# Altium PCB SingleMatrix.PcbDoc
Units mm, origin at the board's own origin, x right, y up, seen from the top; angles counter-clockwise.
Board outline 33.02 x 53.97 mm, 3 copper layers (Top Layer, Drahtbrücke, Bottom Layer); 6 components, 23 nets, 52 pads, 6 vias.
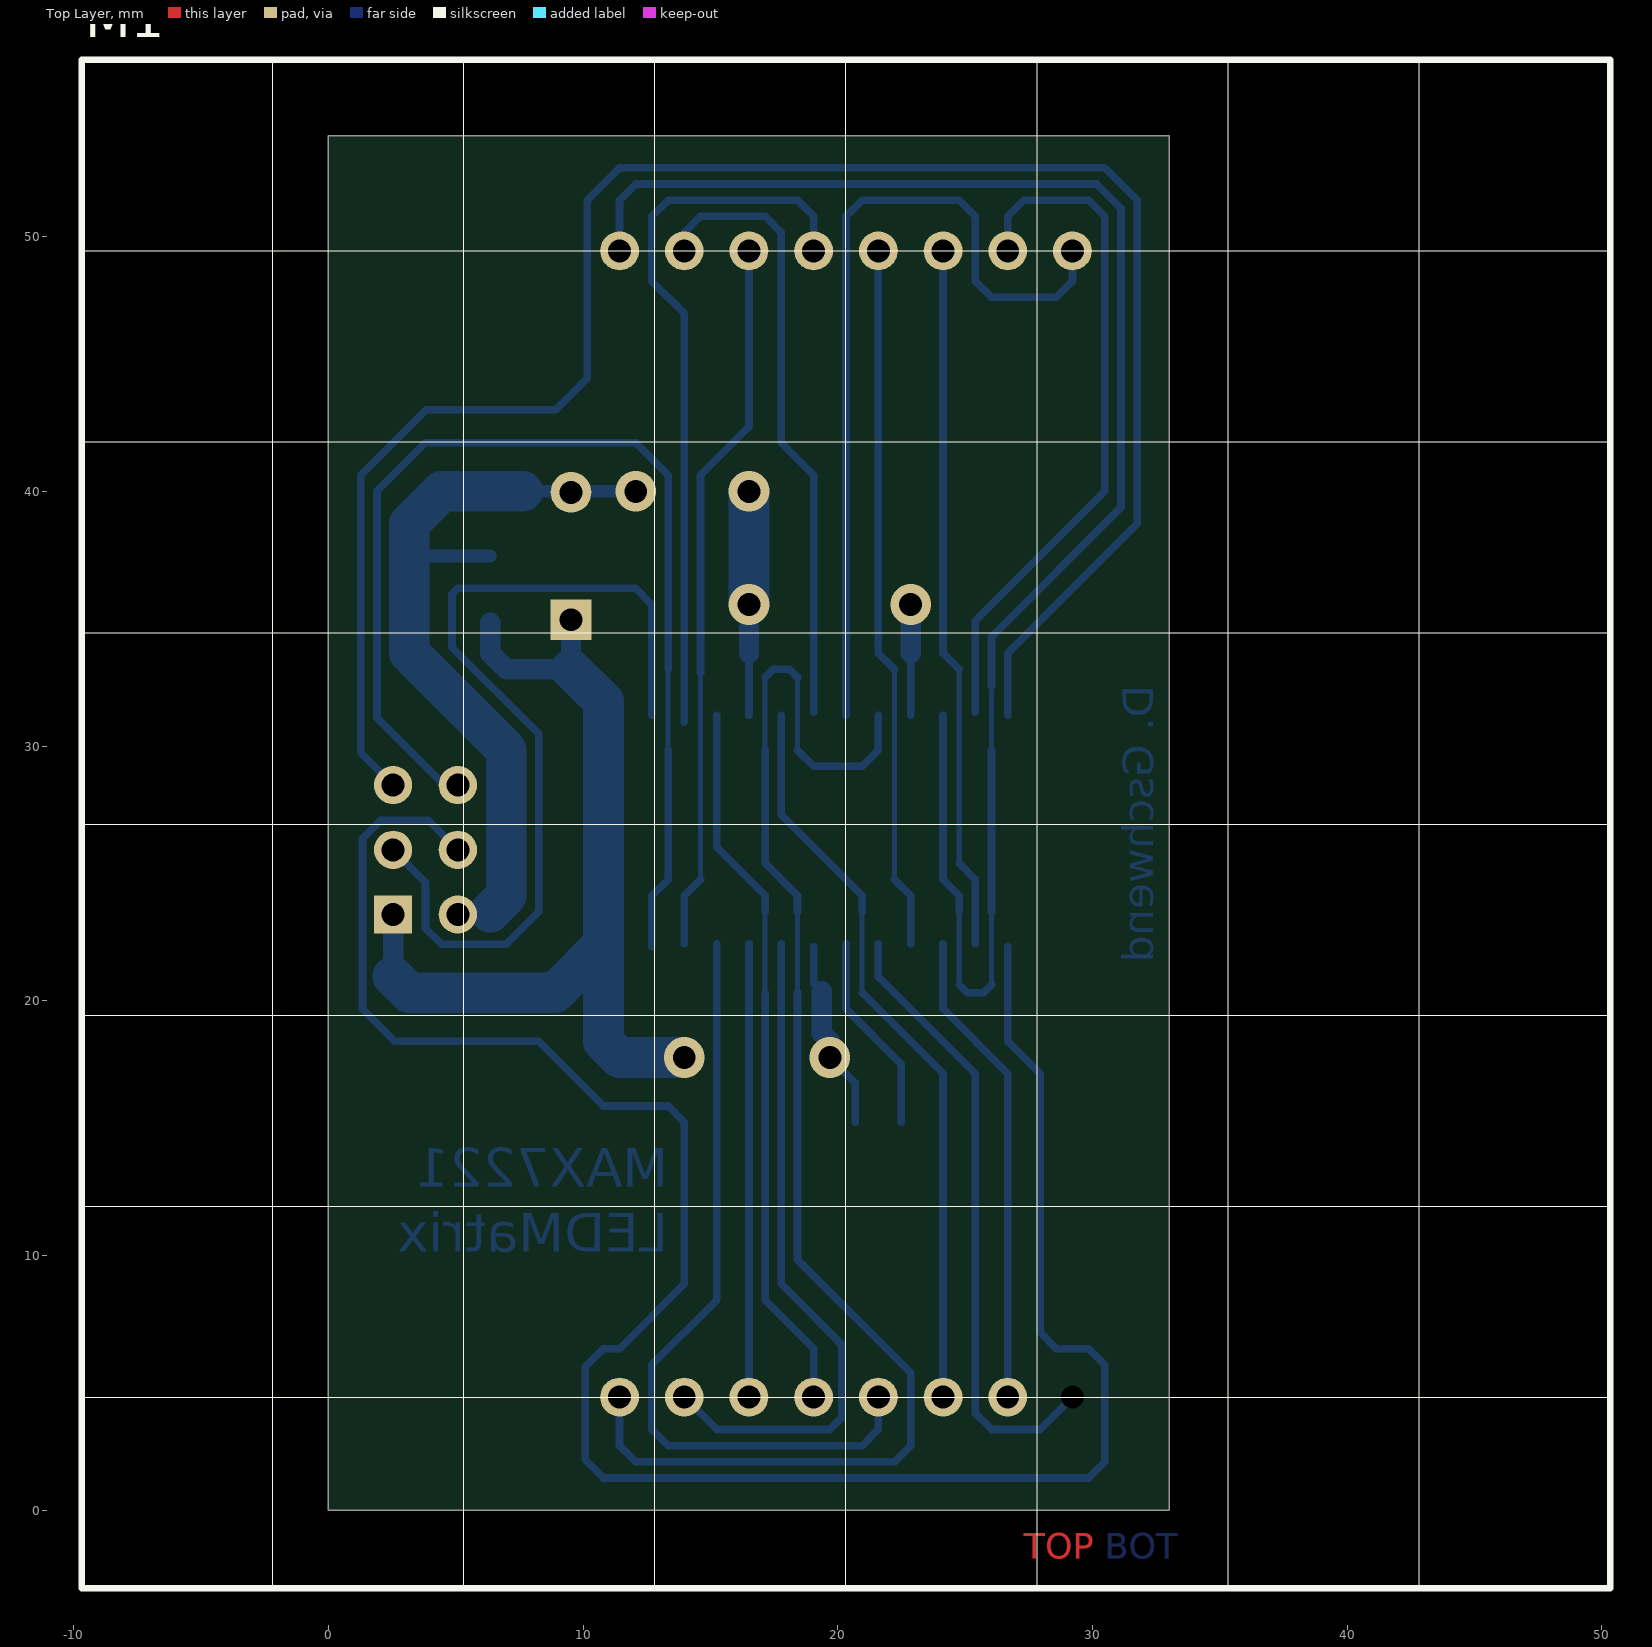
[diagram p0: Top Layer view]
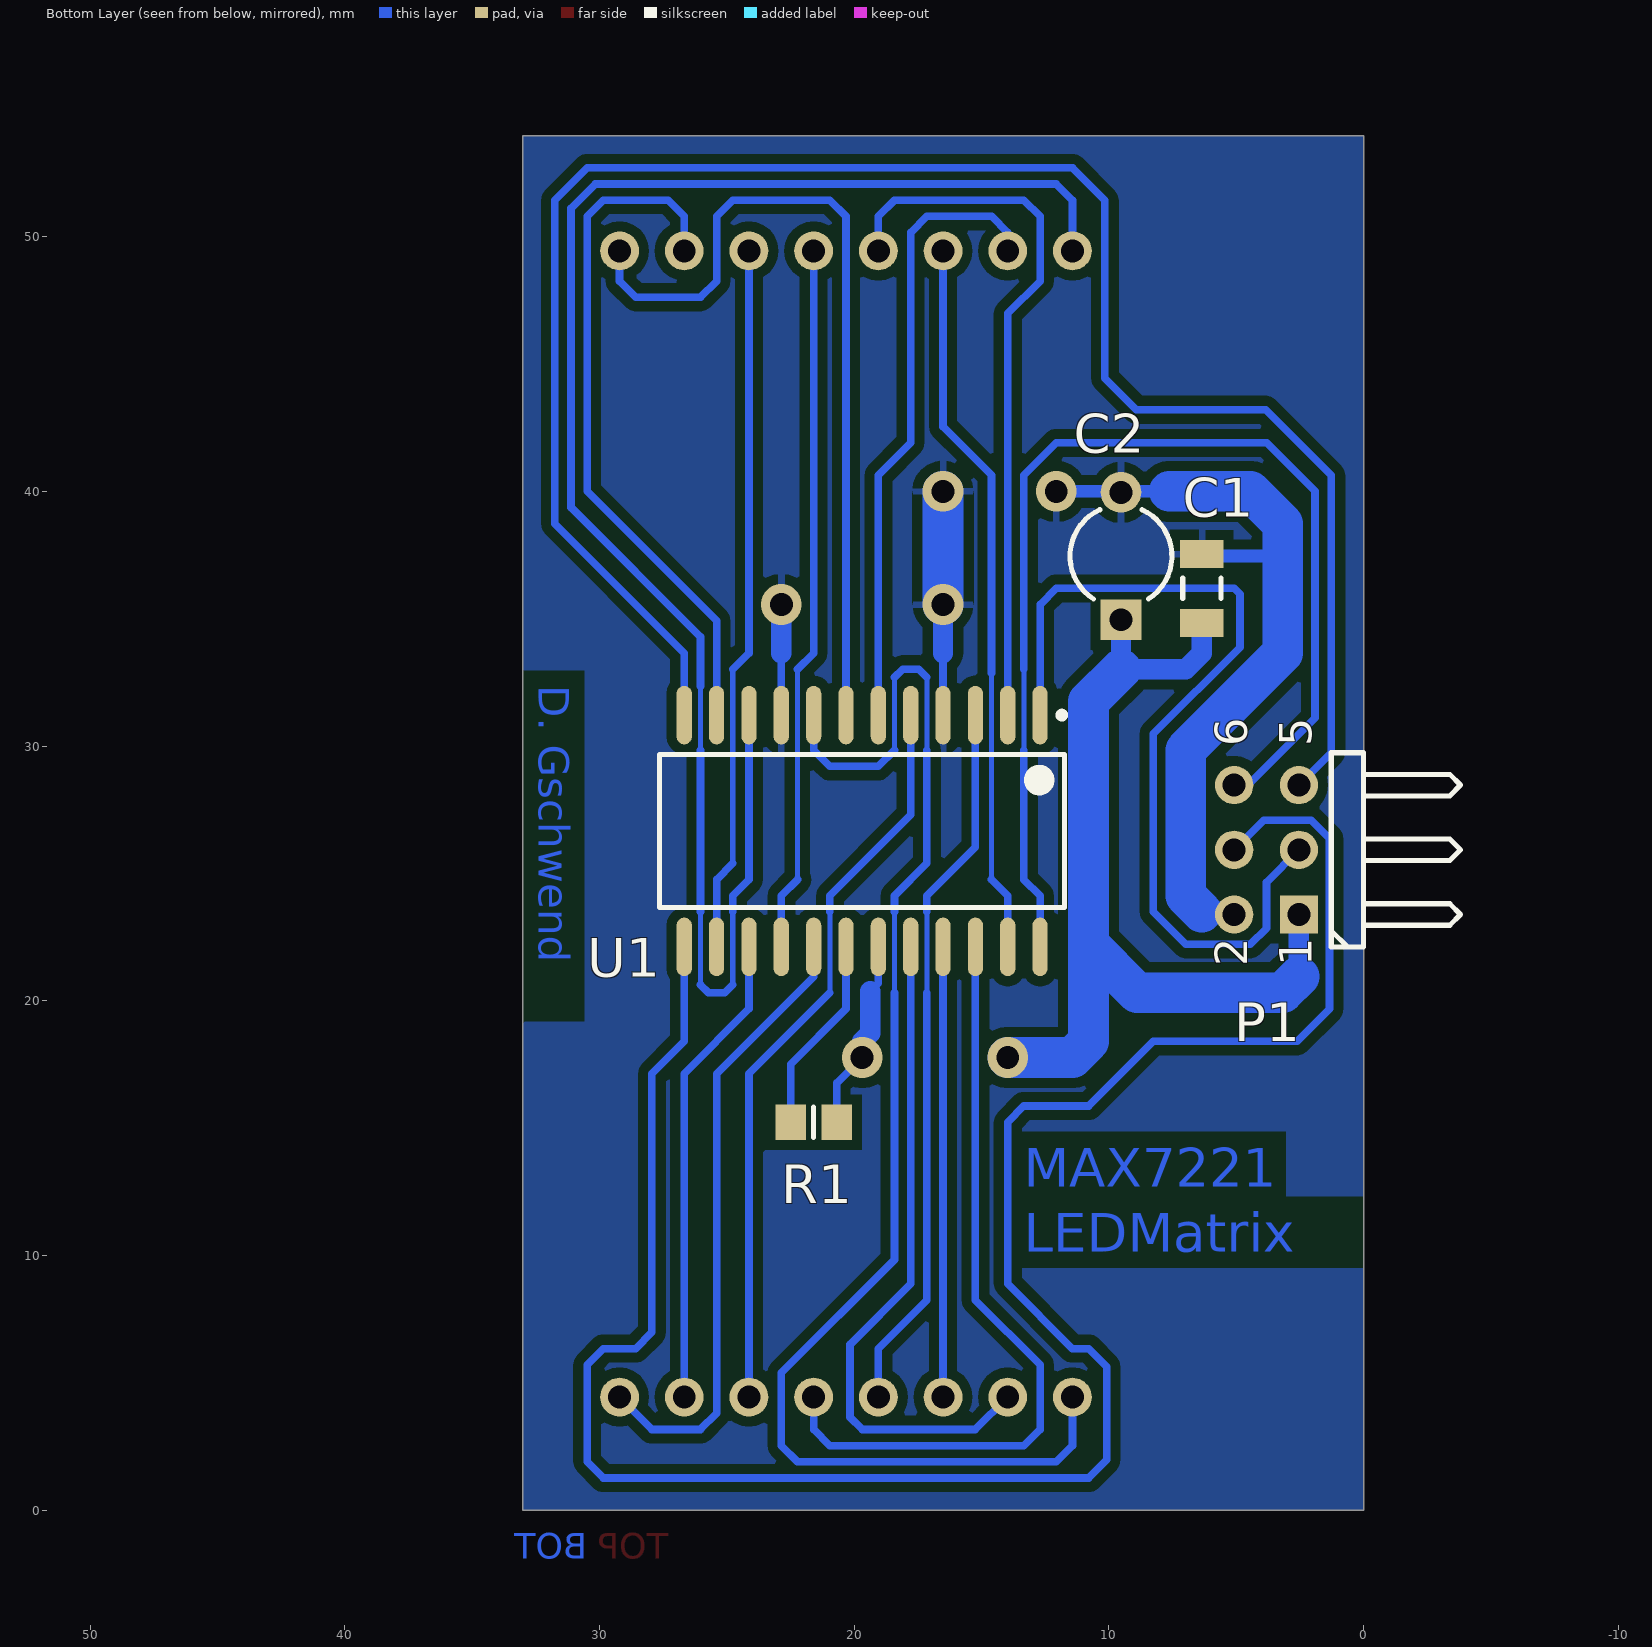
[diagram p1: Bottom Layer view, seen from below]
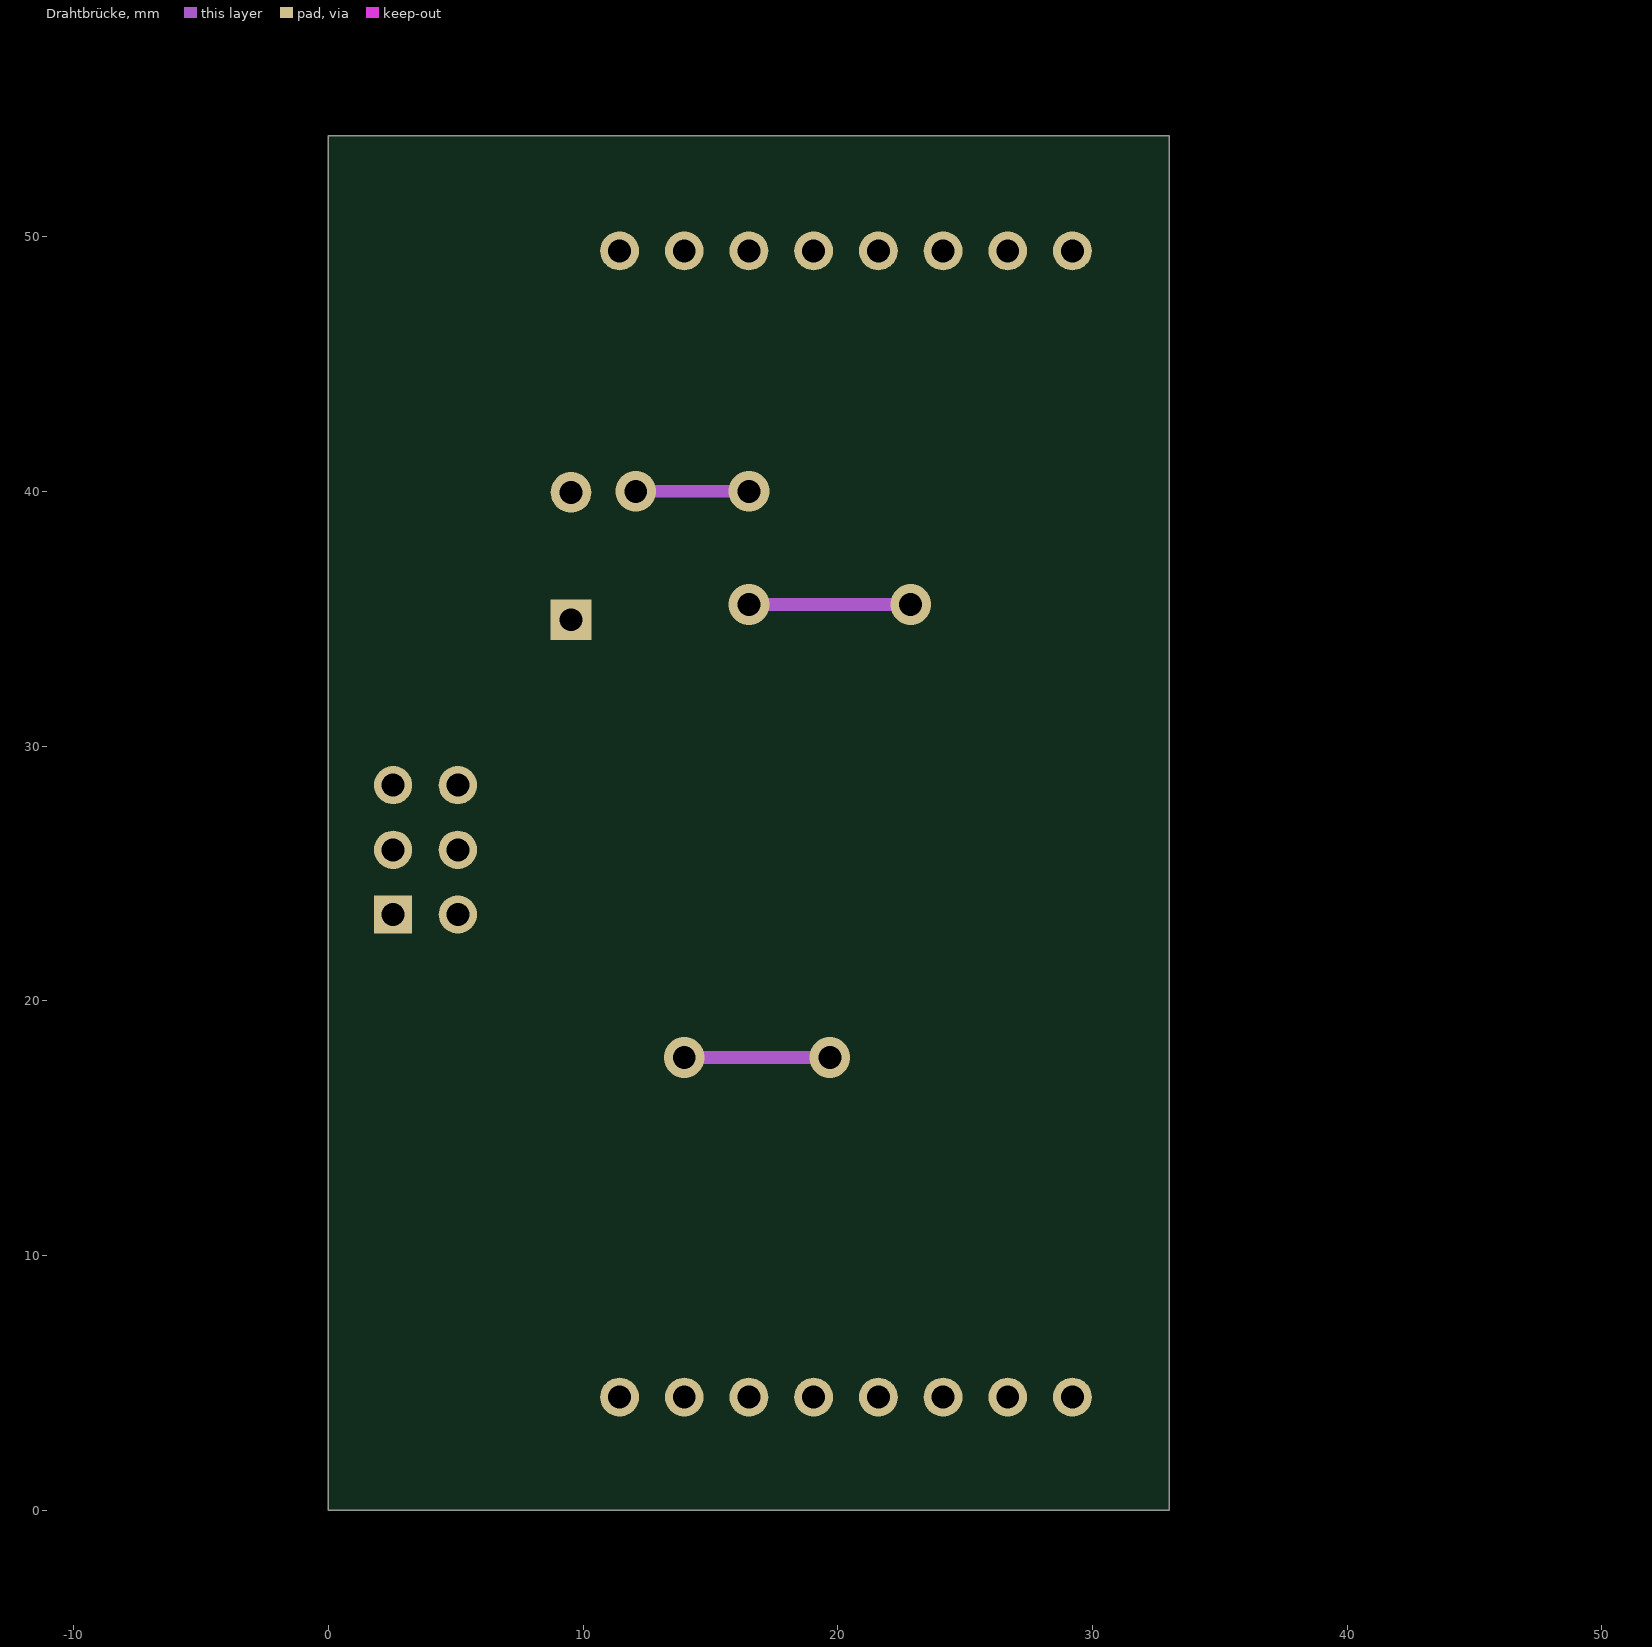
[diagram p2: Drahtbrücke]

## Layer stack, top to bottom
Top Layer: signal copper 0.0356
Dielectric: core 0.32, FR-4, Dk 4.8
Drahtbrücke: signal copper 0.0356
Dielectric: prepreg 0.32, FR-4, Dk 4.8
Bottom Layer: signal copper 0.0356

## Board outline
0,53.975 33.02,53.975 33.02,0 0,0 0,53.975

## Design rules (kind name [scope] priority, off if disabled: settings)
Clearance "Border Clearance" [InNamedPolygon('GND Copper Pour') vs (OnLayer('Mechanical 1'))] p1: gap=0.5
Clearance "Copper Pour Clearance" [InNamedPolygon('GND Copper Pour')] p2: gap=0.4
Clearance "Net Clearance" [All] p3: gap=0.2
HoleSize [All] p1: absolutevalues=TRUE maxlimit=1 minlimit=0.4 maxpercent=80.000 minpercent=20.000
MinimumAnnularRing [All] p1: minimumring=0.3
PolygonConnect [All] p1: connectstyle=Relief reliefconductorwidth=0.254 reliefentries=4 polygonreliefangle="90 Angle"
RoutingVias [All] p1: holewidth=0.711 width=1.27 viastyle="Through Hole" minholewidth=0.711 minwidth=1.27 maxholewidth=0.711 maxwidth=1.27
SilkscreenOverComponentPads [All] p1: minsilkscreentomaskgap=0.254
SolderMaskExpansion [All] p1: expansion=0.102
Width [All] p1: maxlimit=1.6 minlimit=0.2 preferedwidth=0.3
26 further rules are at their usual default settings.

## Components (designator, comment, footprint, x,y, rotation, side; value= is the part's Value field where it differs from the comment)
C1 "" C1206 6.35,36.195 r270 bottom
C2 "" CAPR5-4X5 9.525,37.465 r90 bottom
M1 "LEDMatrix" LEDMATRIX 20.32,4.445 r0 top locked
P1 "Conn" HDR2X3H 2.54,23.392 r90 bottom
R1 "R set" RESC2012N 21.59,15.24 r180 bottom
U1 "MAX7221EWG" WSO24_N 19.685,26.67 r270 bottom locked

## Footprints (in the part's own frame and the unit in brackets; to place one, negate y for a bottom-side part, rotate by r counter-clockwise, add the part's x,y. Pads: shape width x height; smd on the part's side, far side on the other; paste and mask are expansions set on the pad)
C1206 [mm] "Chip Capacitor, Body 3.2x1.6mm, IPC High Density"
  rect 1.1x1.7 smd: 1(-1.35,0) 2(1.35,0)
  silkscreen extent -0.4,-0.75 0.4,0.75, body extent -1.7,-0.9 1.7,0.9, height 1.3
CAPR5-4X5 [mm] "Capacitor; 2 Leads"
  rect 1.6x1.6 hole 0.9: 1(-2.5,0)
  round 1.6 hole 0.9: 2(2.5,0)
  silkscreen extent -1.69,-2 1.82,2
HDR2X3H [mm] "Connector; Header; 3x2 Position; Right Angle"
  rect 1.5x1.5 hole 0.9: 1(0,0)
  round 1.5 hole 0.9: 2(0,2.54) 3(2.54,0) 4(2.54,2.54) 5(5.08,0) 6(5.08,2.54)
  silkscreen extent -1.27,-6.35 6.35,-1.27
LEDMATRIX [mil] "LED Matrix 8x8 weiss (MUFF)"
  round 60 hole 35.43: 1(350,1771.65) 2(250,1771.65) 3(150,1771.65) 4(50,1771.65) 5(-50,1771.65) 6(-150,1771.65) 7(-250,1771.65) 8(-350,1771.65) 10(250,0) 11(150,0) 12(50,0) 13(-50,0) 14(-150,0) 15(-250,0) 16(-350,0)
  round 0 / inner round 60 / far side round 60 hole 35.43: 9(350,0)
  silkscreen extent -1181,-295 1181,2067
RESC2012N [mm] "Chip Resistor, Body 2.0x1.3mm, IPC Medium Density"
  rect 1.2x1.4 smd: 1(-0.9,0) 2(0.9,0)
  silkscreen extent 0,-0.6 0,0.6, body extent -1.07,-0.7 1.07,0.7, height 0.65
WSO24_N [mm] "SOIC, 24-Leads, Body 15.4x7.5mm, Pitch 1.27mm, IPC Medium Density"
  oval 2.3x0.6 smd: 1(-4.55,6.985) 2(-4.55,5.715) 3(-4.55,4.445) 4(-4.55,3.175) 5(-4.55,1.905) 6(-4.55,0.635) 7(-4.55,-0.635) 8(-4.55,-1.905) 9(-4.55,-3.175) 10(-4.55,-4.445) 11(-4.55,-5.715) 12(-4.55,-6.985) 13(4.55,-6.985) 14(4.55,-5.715) 15(4.55,-4.445) 16(4.55,-3.175) 17(4.55,-1.905) 18(4.55,-0.635) 19(4.55,0.635) 20(4.55,1.905) 21(4.55,3.175) 22(4.55,4.445) 23(4.55,5.715) 24(4.55,6.985)
  silkscreen extent -4.67,-7.95 3,7.96, body extent -3.8,-7.8 3.8,7.8, height 2.65

## Part data
C1: library part "Cap Semi", "Capacitor (Semiconductor SIM Model)"
C2: library part Cap2, "Capacitor"
M1: "LED Matrix 8x8 white"
P1: library part "Header 3X2H", "Header, 3-Pin, Dual row, Right Angle"
R1: library part Res3, "Resistor"
U1: "Serially Interfaced, 8-Digit LED Display Driver"

## Via types
v1: diameter 1.6, hole 0.9, Top Layer to Bottom Layer, 6 vias

## Nets (pads, with @x,y where several pads share a name; then routed paths per layer and width w, separated by ;. In a path a pad name is that pad's centre, name@x,y a point inside that pad or via, vN(x,y) a via of type N, cw(c..) or ccw(c..) an arc to the next point about the centre after c; other vN are vias at no path point)
GND: C1.1 C2.2 P1.2 U1.4 U1.9 | length 56.2
  Drahtbrücke w0.5: v1(12.065,40.005) v1(16.51,40.005) ; v1(16.51,35.56) v1(22.86,35.56)
  Bottom Layer w0.3: U1.4 16.51,33.655 ; U1.9 22.86,33.655
  Bottom Layer w0.5: 3.175,37.465 C1.1@6.35,37.465 ; 7.62,40.005 9.485,40.005 C2.2 9.565,40.005 v1(12.065,40.005)
  Bottom Layer w0.8: P1.2@5.08,23.495 6.35,23.495 ; 16.51,33.655 v1(16.51,35.56) ; 22.86,33.655 v1(22.86,35.56)
  Bottom Layer w1.6: 3.175,37.465 3.175,38.735 ; 6.35,23.495 6.985,24.13 6.985,29.845 3.175,33.655 3.175,38.735 ; 7.62,40.005 4.445,40.005 3.175,38.735 ; v1(16.51,35.56) v1(16.51,40.005)
NetM1_1: M1.1 U1.7 | length 33.2
  Bottom Layer w0.3: U1.7 20.32,50.8 20.955,51.435 24.765,51.435 25.4,50.8 25.4,48.26 26.035,47.625 28.575,47.625 29.21,48.26 M1.1
NetM1_2: M1.2 U1.11 | length 27.3
  Bottom Layer w0.3: U1.11@25.4,31.34 25.4,34.925 30.48,40.005 30.48,50.8 29.845,51.435 27.305,51.435 26.67,50.8 M1.2
NetM1_3: M1.3 U1.14 | length 27.7
  Bottom Layer w0.2: 24.765,25.4 24.765,33.02
  Bottom Layer w0.3: M1.3 24.13,33.655 24.765,33.02 ; 24.765,25.4 25.4,24.765 U1.14@25.4,22.24
NetM1_4: M1.4 U1.16 | length 27.7
  Bottom Layer w0.2: 22.225,24.765 22.225,32.074 22.225,33.02
  Bottom Layer w0.3: M1.4 21.59,33.655 22.225,33.02 ; 22.225,24.765 22.86,24.13 U1.16@22.86,22.24
NetM1_5: M1.5 U1.2 | length 28.6
  Bottom Layer w0.3: U1.2@13.97,30.94 U1.2 13.97,46.99 12.7,48.26 12.7,50.8 13.335,51.435 18.415,51.435 19.05,50.8 M1.5
NetM1_6: M1.6 U1.23 | length 28.3
  Bottom Layer w0.2: 14.605,24.765 14.605,32.874
  Bottom Layer w0.3: U1.23@13.97,22.24 13.97,24.13 14.605,24.765 ; 14.605,32.874 14.605,40.64 16.51,42.545 M1.6
NetM1_7: M1.7 U1.6 | length 24.4
  Bottom Layer w0.3: M1.7 13.97,50.165 14.605,50.8 17.145,50.8 17.78,50.165 17.78,41.91 19.05,40.64 U1.6@19.05,31.34
NetM1_8: M1.8 U1.10 | length 67.3
  Bottom Layer w0.2: 24.765,20.638 24.765,23.495 ; 26.035,20.638 26.035,23.495 ; 26.035,29.845 26.035,32.354
  Bottom Layer w0.3: M1.8 11.43,51.435 12.065,52.07 30.162,52.07 31.115,51.118 31.115,39.37 26.035,34.29 26.035,32.354 ; U1.10 24.13,24.765 24.765,24.13 24.765,23.495 ; 24.765,20.638 25.082,20.32 25.717,20.32 26.035,20.638 ; 26.035,23.495 26.035,29.845
NetM1_9: M1.9 U1.17 | length 24.6
  Bottom Layer w0.3: U1.17@21.59,22.24 21.59,20.955 25.4,17.145 25.4,3.81 26.035,3.175 27.94,3.175 M1.9
NetM1_10: M1.10 U1.15 | length 18.8
  Bottom Layer w0.3: U1.15@24.13,22.24 24.13,19.685 26.67,17.145 M1.10
NetM1_11: M1.11 U1.5 | length 29.4
  Bottom Layer w0.2: 20.955,20.32 20.955,23.495
  Bottom Layer w0.3: U1.5 17.78,27.305 20.955,24.13 20.955,23.495 ; 20.955,20.32 24.13,17.145 M1.11
NetM1_12: M1.12 U1.22 | length 30.8
  Bottom Layer w0.3: U1.22@15.24,22.24 15.24,8.255 12.7,5.715 12.7,3.175 13.335,2.54 20.955,2.54 21.59,3.175 M1.12
NetM1_13: M1.13 U1.3 | length 28.4
  Bottom Layer w0.2: 17.145,20.32 17.145,23.495
  Bottom Layer w0.3: U1.3 15.24,26.035 17.145,24.13 17.145,23.495 ; 17.145,20.32 17.145,8.255 19.05,6.35 M1.13
NetM1_14: M1.14 U1.21 | length 17.8
  Bottom Layer w0.3: M1.14 U1.21@16.51,22.24
NetM1_15: M1.15 U1.20 | length 26.5
  Bottom Layer w0.3: M1.15 15.24,3.175 19.685,3.175 20.162,3.652 20.162,6.508 17.78,8.89 U1.20 U1.20@17.78,22.24
NetM1_16: M1.16 U1.8 | length 55.9
  Bottom Layer w0.2: 17.145,29.845 17.145,32.703 ; 18.415,20.32 18.415,23.495 ; 18.415,29.845 18.415,32.703
  Bottom Layer w0.3: M1.16 11.43,2.54 12.065,1.905 22.225,1.905 22.86,2.54 22.86,5.398 18.415,9.843 18.415,20.32 ; 17.145,29.845 17.145,25.4 18.415,24.13 18.415,23.495 ; 17.145,32.703 17.462,33.02 18.098,33.02 18.415,32.703 ; 18.415,29.845 19.05,29.21 20.955,29.21 21.59,29.845 U1.8
NetP1_3: P1.3 U1.1 | length 35.3
  Bottom Layer w0.3: P1.3 3.81,24.662 3.81,22.86 4.445,22.225 6.985,22.225 8.255,23.495 8.255,30.48 4.85,33.885 4.85,35.965 5.08,36.195 12.065,36.195 12.7,35.56 U1.1
NetP1_4: P1.4 U1.13 | length 84.4
  Bottom Layer w0.3: P1.4 3.926,27.086 2.062,27.086 1.336,26.36 1.336,19.685 2.606,18.415 8.255,18.415 10.795,15.875 13.335,15.875 13.97,15.24 13.97,8.89 11.43,6.35 10.795,6.35 10.086,5.641 10.086,1.979 10.795,1.27 29.845,1.27 30.48,1.905 30.48,5.715 29.845,6.35 28.575,6.35 27.94,6.985 27.94,17.145 26.67,18.415 U1.13
NetP1_5: P1.5 U1.12 | length 75.1
  Bottom Layer w0.3: P1.5 1.27,29.742 1.27,40.64 3.837,43.207 8.917,43.207 10.16,44.45 10.16,51.435 11.43,52.705 30.48,52.705 31.75,51.435 31.75,38.735 26.67,33.655 U1.12
NetP1_6: P1.6 U1.24 | length 44.7
  Bottom Layer w0.2: 13.335,29.845 13.335,33.02
  Bottom Layer w0.3: P1.6 4.548,28.472 1.905,31.115 1.905,40.005 3.81,41.91 12.065,41.91 13.335,40.64 13.335,33.02 ; U1.24 12.7,24.13 13.335,24.765 13.335,29.845
NetR1_1: R1.1 U1.18 | length 7.9
  Bottom Layer w0.3: U1.18@20.32,22.24 U1.18 20.32,19.685 22.49,17.515 R1.1
VCC: C1.2 C2.1 P1.1 R1.2 U1.19 | length 50.5
  Drahtbrücke w0.5: v1(13.97,17.78) v1(19.685,17.78)
  Bottom Layer w0.3: U1.19 19.05,20.701 19.367,20.384 ; v1(19.685,17.78) 20.69,16.775 R1.2
  Bottom Layer w0.5: C2.1@9.405,34.845 C2.1
  Bottom Layer w0.8: 2.54,20.955 P1.1 ; C1.2 6.35,33.655 6.985,33.02 9.525,33.02 C2.1 ; 19.367,20.384 19.367,18.733 19.685,18.415 v1(19.685,17.78) v1@19.812,17.907
  Bottom Layer w1.6: 2.54,20.955 3.175,20.32 8.89,20.32 10.795,22.225 ; 9.525,33.02 10.795,31.75 10.795,22.225 ; v1(13.97,17.78) 11.43,17.78 10.795,18.415 10.795,22.225

## Polygon pours and split planes (outlines as drawn)
GND on Bottom Layer "GND Copper Pour" (solid, pour order 4): 0,53.975 33.02,53.975 33.02,0 0,0 0,53.975

## Other copper
Top Layer:
  text "TOP" at 27.305,-1.905 h1
Bottom Layer:
  text "D. Gschwend" at 32.385,32.385 h1.2 r90
  text "MAX7221" at 13.335,12.7 h1.52
  text "LEDMatrix" at 13.335,10.16 h1.52
  text "BOT" at 30.48,-1.905 h1

## Silkscreen, mask and mechanical layers (free items; w line width, h text height)
Mechanical 1:
  the board outline again, w0.254

## Text inside footprints (layer, text, board x,y; h text height)
M1: Mechanical 1 "LED Matrix 8x8 white" at 0,54.61 h1
P1: Bottom Overlay "2" at 4.572,21.36 h1.27 r270; Bottom Overlay "1" at 2.032,21.36 h1.27 r270; Bottom Overlay "5" at 2.032,29.996 h1.27 r270; Bottom Overlay "6" at 4.572,29.996 h1.27 r270